# Altium PCB LibreSolar_BMS48V.PcbDoc (part 1 of 2)
Units mm, origin at the board's own origin, x right, y up, seen from the top; angles counter-clockwise.
Board outline 165 x 165 mm, 2 copper layers (Top, Bottom); 195 components, 138 nets, 620 pads, 56 vias.
Unrouted connection lines stored in the file: 54.
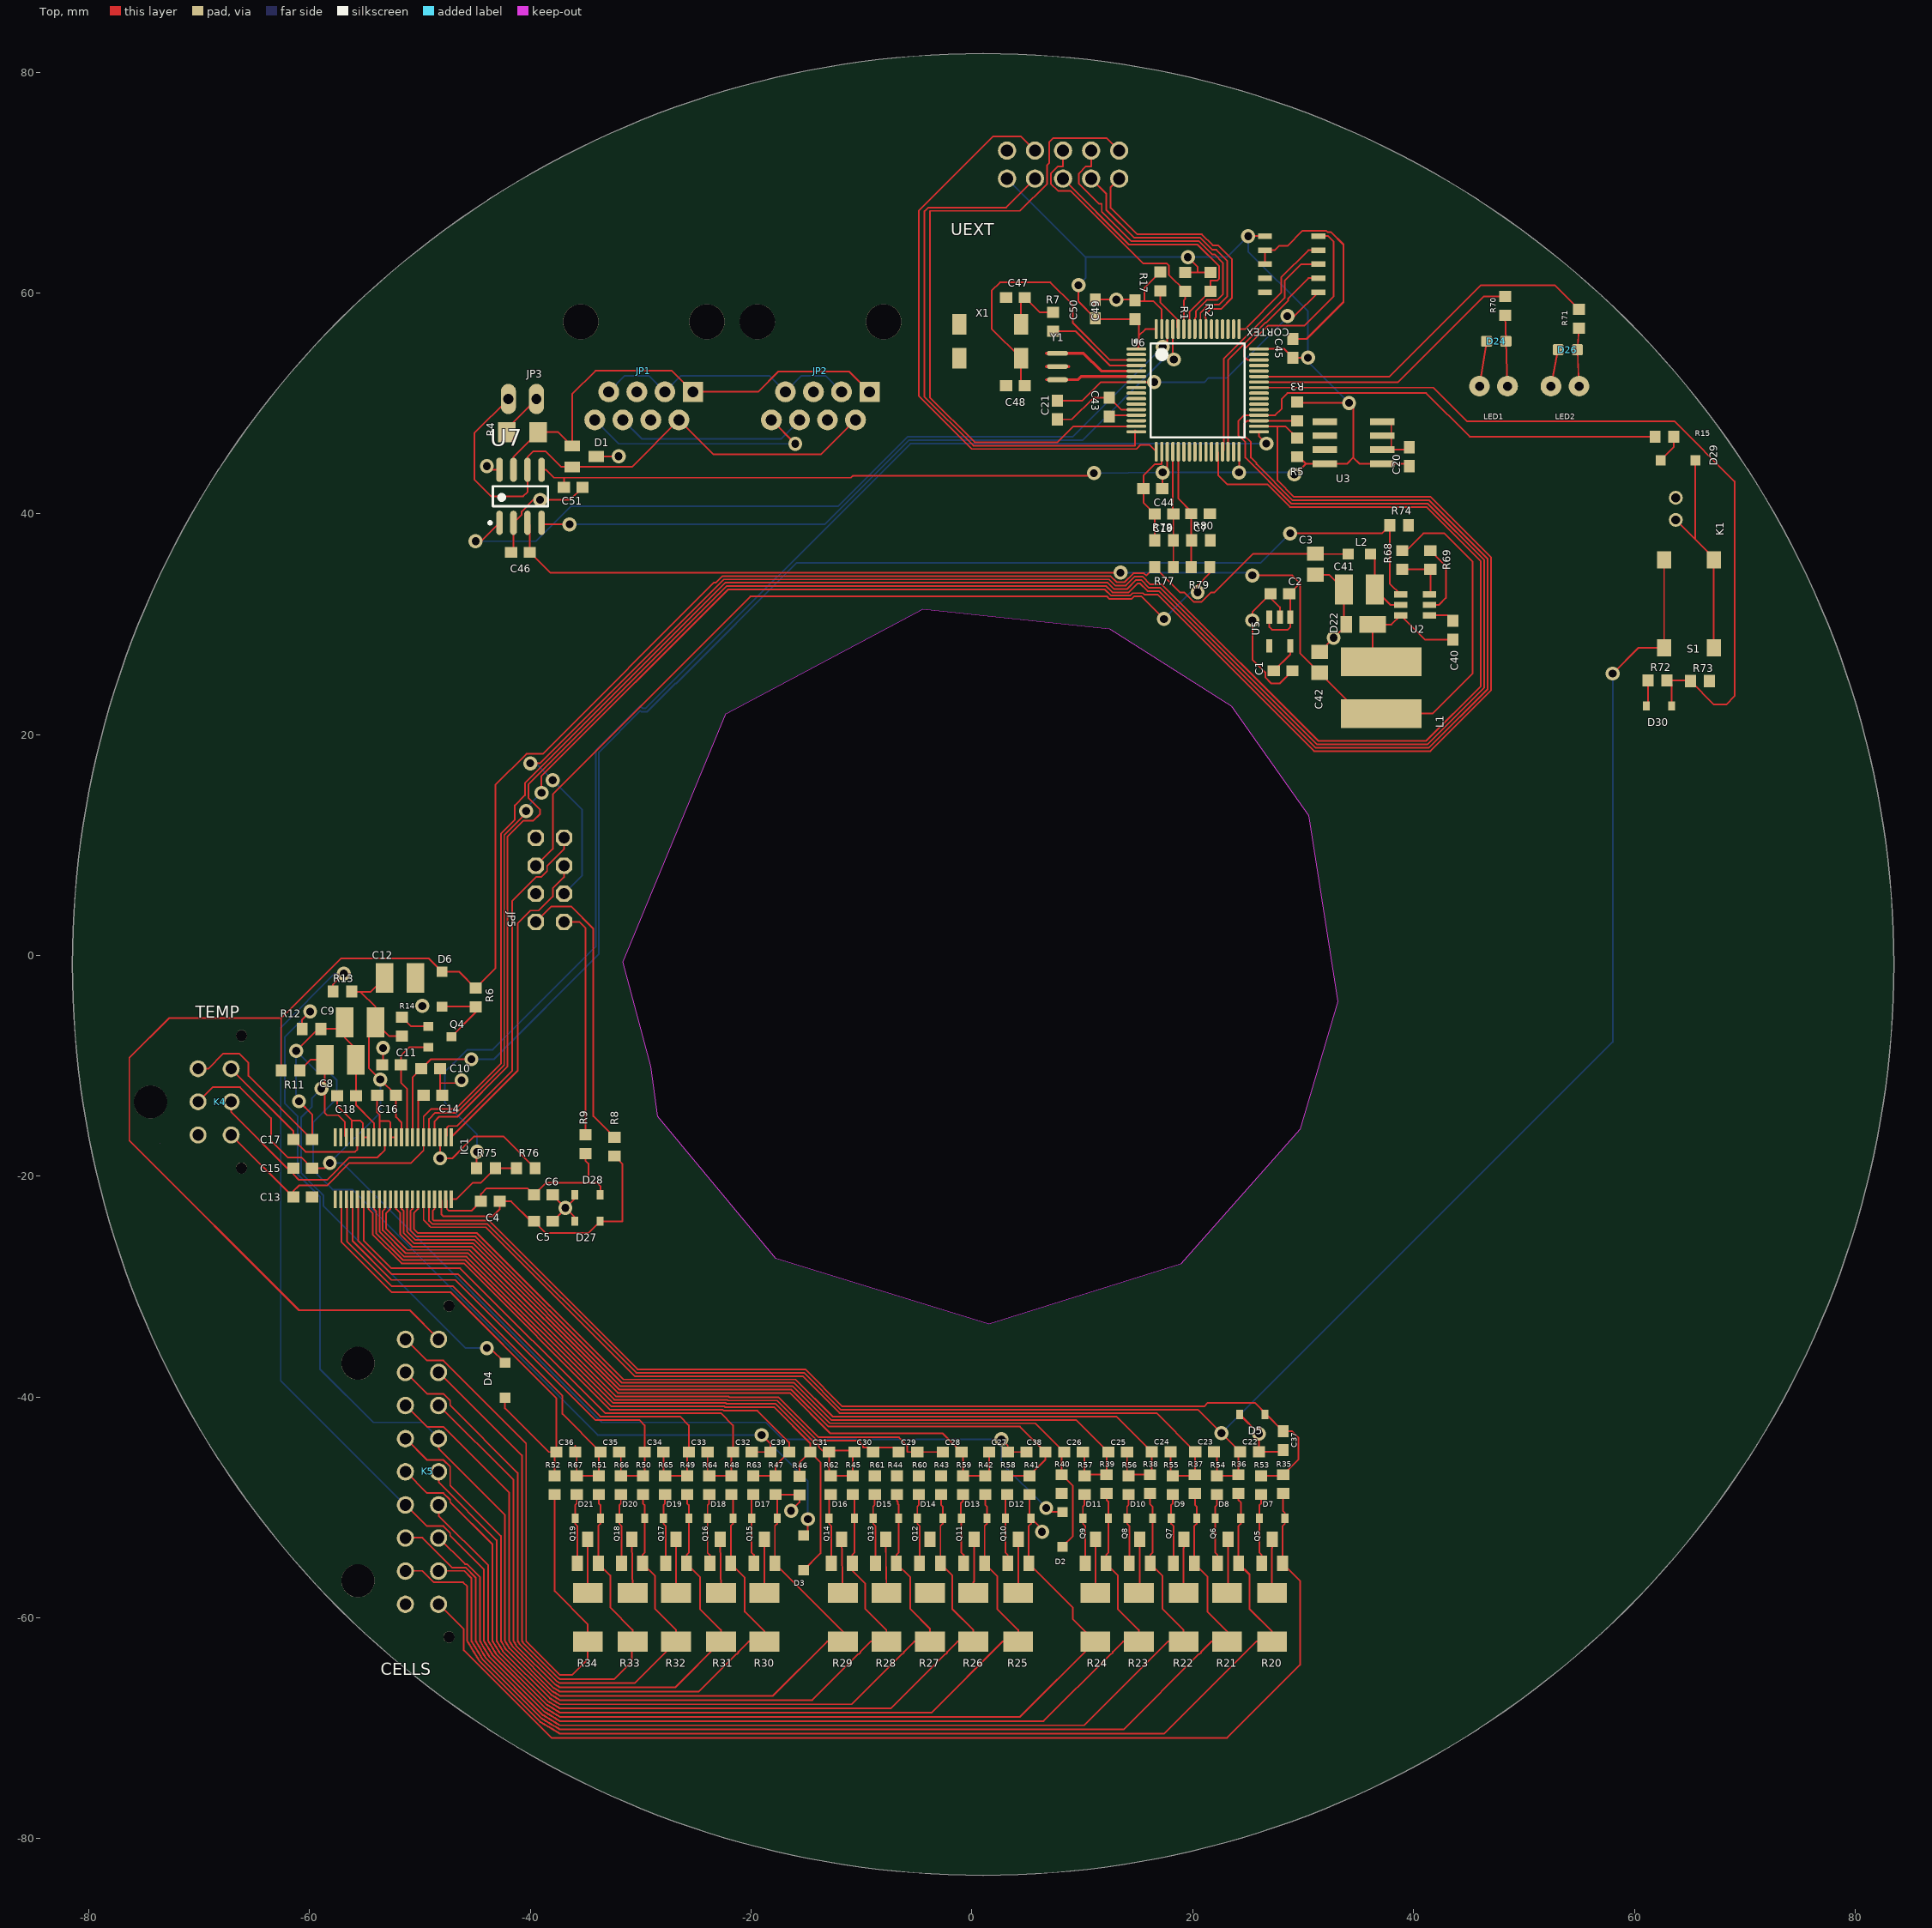
[diagram p0: Top view]
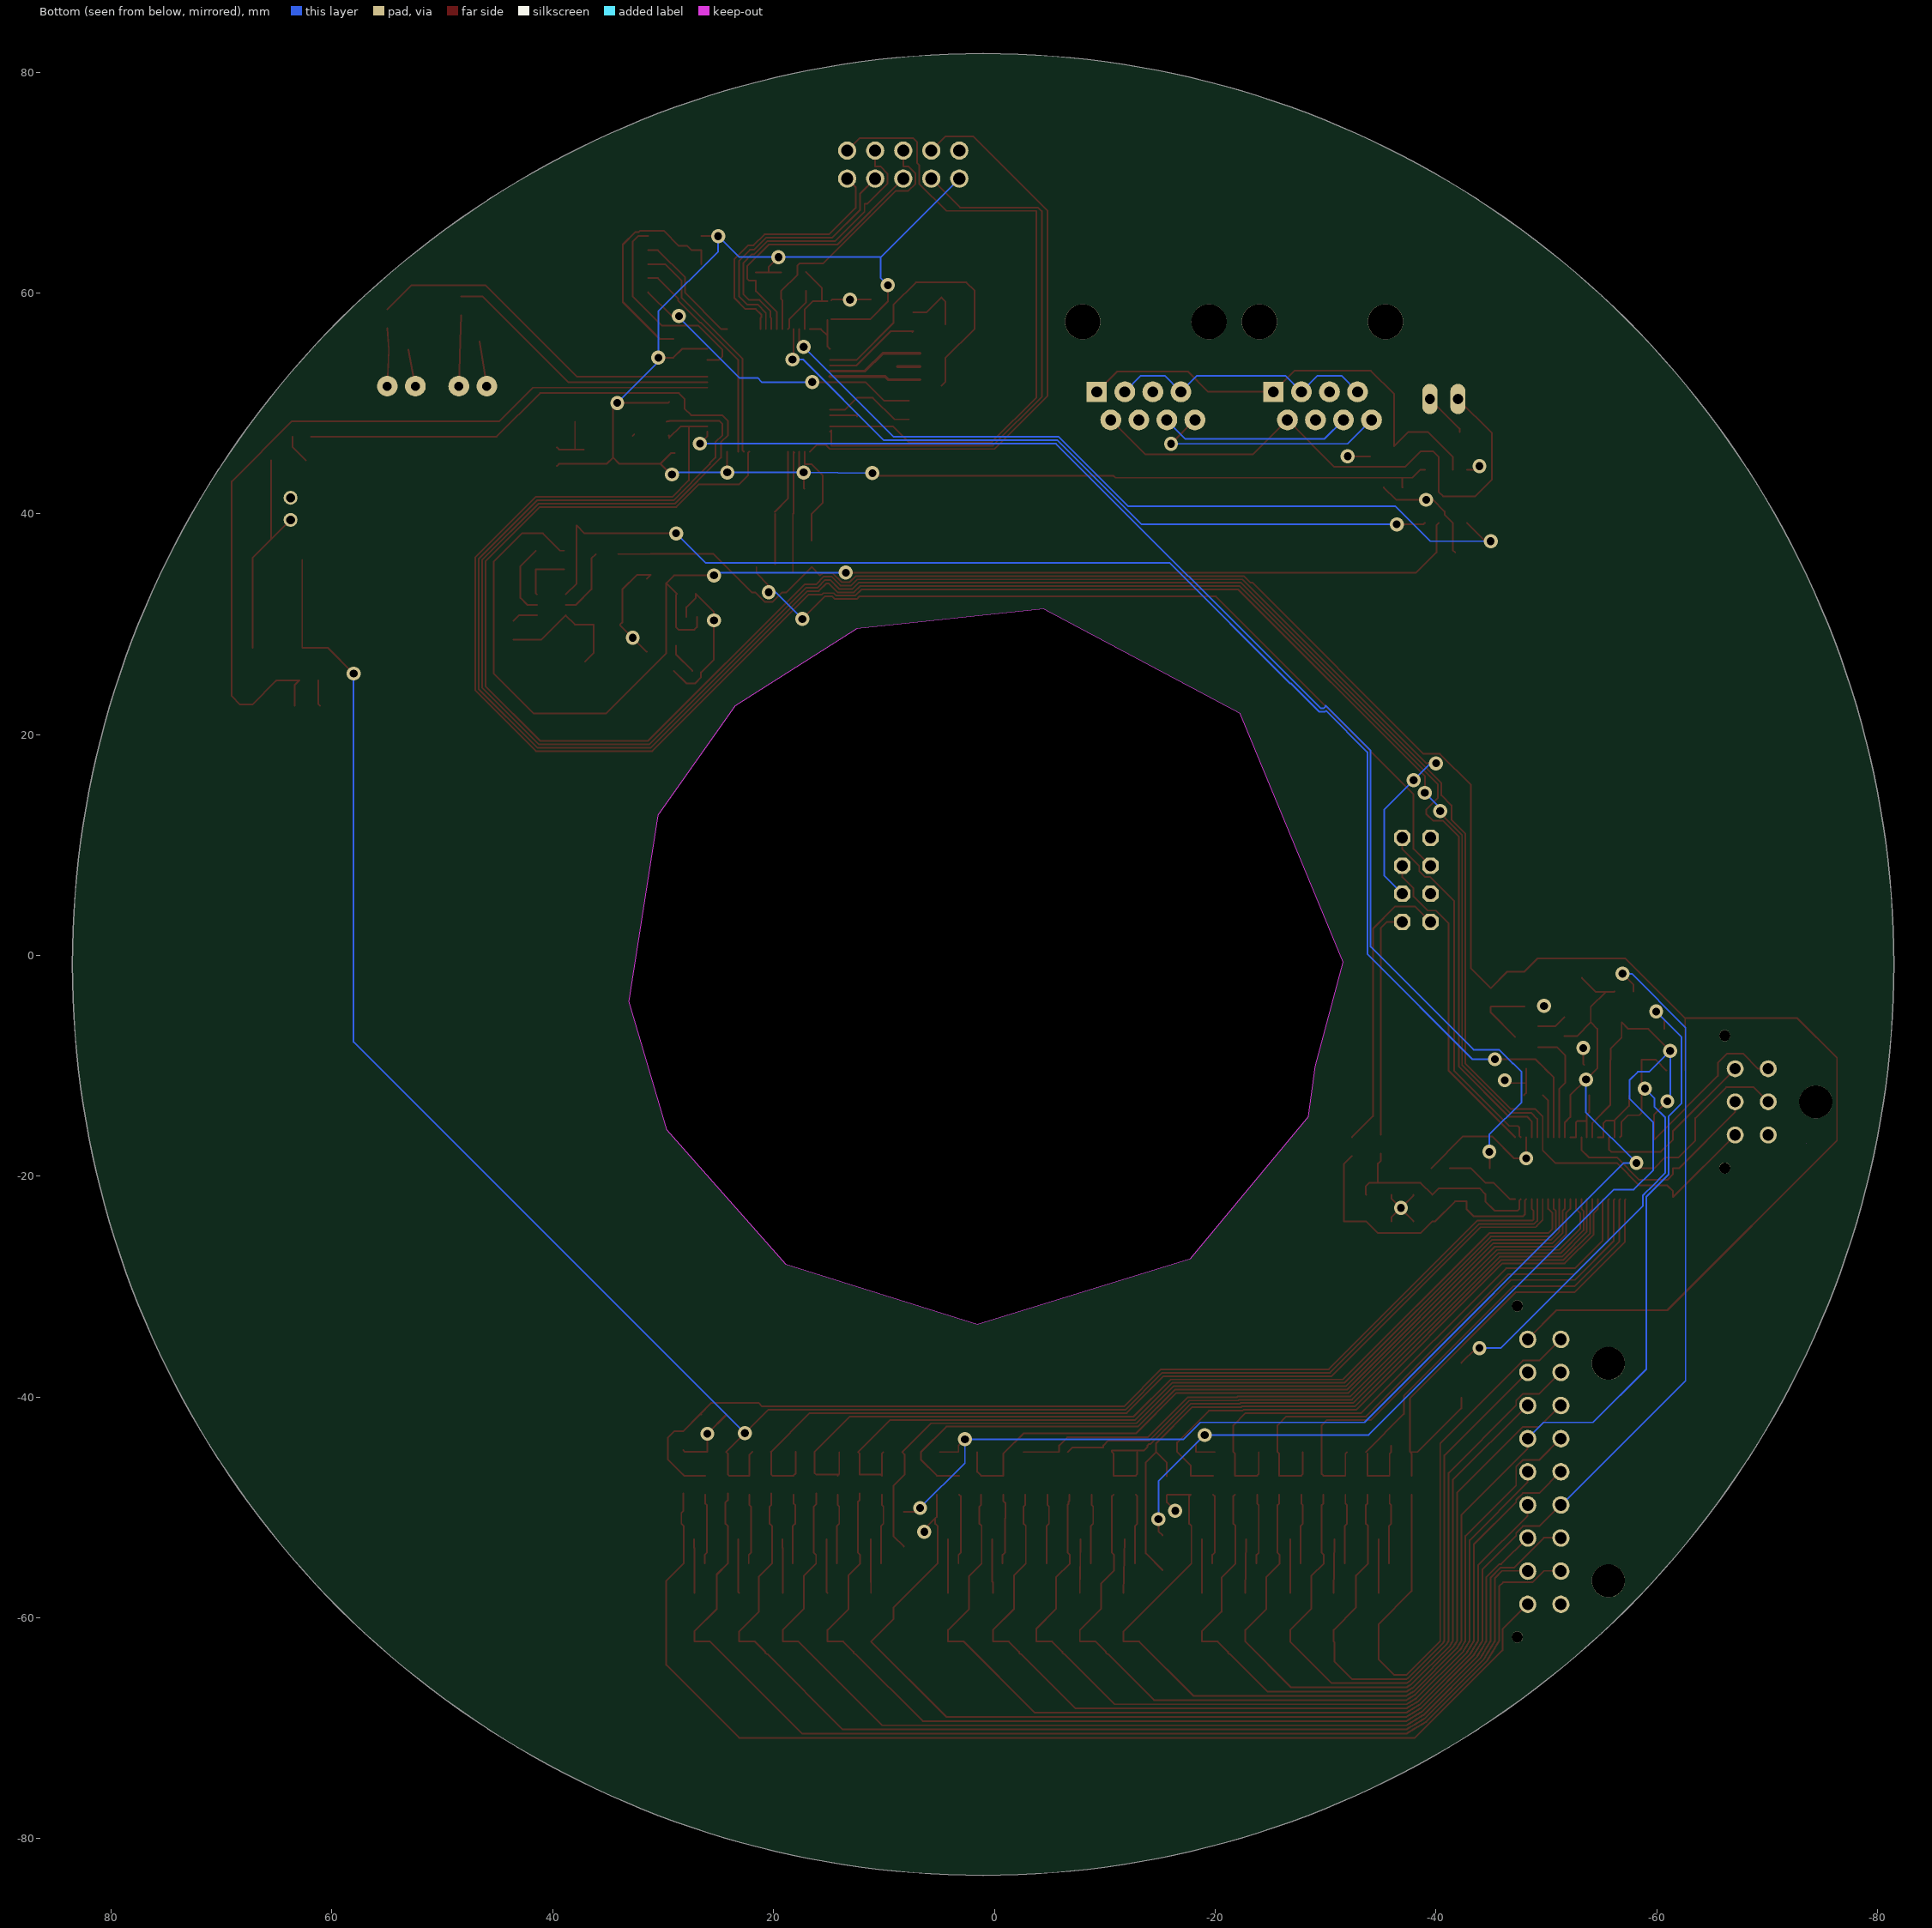
[diagram p1: Bottom view, seen from below]

## Layer stack, top to bottom
Top Solder: solder mask 0.0102, Solder Resist, Dk 3.5
Top: signal copper 0.035
Dielectric 1: dielectric 0.32, FR-4, Dk 4.8
Bottom: signal copper 0.035
Bottom Solder: solder mask 0.0102, Solder Resist, Dk 3.5

## Board outline
-81.484,-0.812 ccw(c1.016,-0.812) 1.016,-83.312 ccw(c1.016,-0.812) 83.516,-0.812 ccw(c1.016,-0.812) 1.016,81.688 ccw(c1.016,-0.812)
cut-out: -31.598,-0.601 -22.271,21.887 -4.445,31.369 12.446,29.591 23.495,22.606 30.48,12.7 33.147,-4.191 29.718,-15.748 18.923,-27.94 1.524,-33.401 -17.78,-27.432 -28.448,-14.605 -29.083,-10.033
cut-out: -73.533,-17.018

## Design rules (kind name [scope] priority, off if disabled: settings)
Clearance "Clearance (Same Net)" [All] p1: gap=0.152 ignorepadtopadclearanceinfootprint=TRUE except(0.203: Track-THPad SMDPad-SMDPad SMDPad-THPad THPad-THPad)
Clearance Clearance_for_NetClass_VIN [InNetClass('VIN') vs InNetClass('VIN')] p2: gap=0.152 ignorepadtopadclearanceinfootprint=FALSE
Clearance Clearance_for_NetClass_power [InNetClass('power') vs InNetClass('power')] p3: gap=0.152 ignorepadtopadclearanceinfootprint=FALSE
Clearance [All] p4: gap=0.152 ignorepadtopadclearanceinfootprint=TRUE except(0.203: Track-THPad THPad-THPad)
HoleSize HoleSize_For_NetClass_VIN [InNetClass('VIN')] p1: absolutevalues=TRUE maxlimit=0.3 minlimit=0.3 maxpercent=80.000 minpercent=20.000
HoleSize HoleSize_For_NetClass_power [InNetClass('power')] p2: absolutevalues=TRUE maxlimit=0.5 minlimit=0.5 maxpercent=80.000 minpercent=20.000
HoleSize [All] p3: absolutevalues=TRUE maxlimit=2540 minlimit=0.25 maxpercent=80.000 minpercent=20.000
HoleToHoleClearance mdDrill [All] p1: gap=0.61 allowstackedmicrovias=TRUE
PasteMaskExpansion mlMinCreamFrame [All] p1: expansion=0
PolygonConnect PolygonConnect_For_PolygonThermal_OFF [InPolygonClass('PolygonThermal_OFF')] p1: connectstyle=Direct reliefconductorwidth=0.254 reliefentries=4 polygonreliefangle="90 Angle" airgapwidth=0.254
PolygonConnect PolygonConnect_For_PolygonThermal_ON_Width160000_Gap120000 [InPolygonClass('PolygonThermal_ON_Width160000_Gap120000')] p2: connectstyle=Relief reliefconductorwidth=0.406 reliefentries=4 polygonreliefangle="90 Angle" airgapwidth=0.305
PolygonConnect ThermalVias [IsVia] p3: connectstyle=Direct reliefconductorwidth=0.254 reliefentries=4 polygonreliefangle="90 Angle" airgapwidth=0.254
PolygonConnect [All] p4: connectstyle=Relief reliefconductorwidth=0.254 reliefentries=4 polygonreliefangle="90 Angle" airgapwidth=0.254
RoutingVias [All] p1: holewidth=0.25 width=0.707 viastyle="Through Hole" minholewidth=0.25 minwidth=0.707 maxholewidth=2.54 maxwidth=2.54
ShortCircuit [All] p1: allowed=TRUE
SolderMaskExpansion mlMinStopFrame [All] p1: expansion=0.076
Width Width_For_NetClass_VIN [InNetClass('VIN')] p1: maxlimit=0.254 minlimit=0.203 preferedwidth=0.203
Width Width_For_NetClass_power [InNetClass('power')] p2: maxlimit=0.254 minlimit=0.203 preferedwidth=0.203
Width [All] p3: maxlimit=254 minlimit=0.152 preferedwidth=0.152
26 further rules are at their usual default settings.

## Classes and differential pairs
component class LibreSolar_BMS48V_1: C1 C2 C3 C20 C21 C40 C41 C42 C43 C44 C45 C46 C47 C48 C49 C50 C51 CORTEX D1 D22 D24 D26 JP1 JP2 JP3 L1 L2 LED1 LED2 R3 R4 R5 R7 R17 R68 R69 R70 R71 R74 U2 U3 U5 U6 U7 UEXT X1 Y1
component class LibreSolar_BMS48V_0: C4 C5 C6 C7 C8 C9 C10 C11 C12 C13 C14 C15 C16 C17 C18 C19 C22 C23 C24 C25 C26 C27 C28 C29 C30 C31 C32 C33 C34 C35 C36 C37 C38 C39 CELLS D2 D3 D4 D5 D6 D7 D8 D9 D10 D11 D12 D13 D14 D15 D16 D17 D18 D19 D20 D21 D27 D28 D29 D30 IC1 JP5 K1 K4 K5 Q4 Q5 Q6 Q7 Q8 Q9 Q10 Q11 Q12 Q13 Q14 Q15 Q16 Q17 Q18 Q19 R6 R8 R9 R11 R12 R13 R14 R15 R20 R21 R22 R23 R24 R25 R26 R27 R28 R29 R30 R31 R32 R33 R34 R35 R36 R37 R38 R39 R40 R41 R42 R43 R44 R45 R46 R47 R48 R49 R50 R51 R52 R53 R54 R55 R56 R57 R58 R59 R60 R61 R62 R63 R64 R65 R66 R67 R72 R73 R75 R76 R77 R78 R79 R80 S1 TEMP

## Components (designator, comment, footprint, x,y, rotation, side; value= is the part's Value field where it differs from the comment)
C1 "2.2µ" C0603 28.194,25.781 r0 top
C2 "1µ" C0603 27.894,32.753 r180 top
C3 "1µ" C0805 31.115,35.433 r270 top
C4 "100n" C0603 -43.622,-22.271 r180 top
C5 "100n" C0603 -38.822,-24.071 r0 top
C6 "100n" C0603 -38.822,-21.671 r0 top
C7 "100n" C0603 20.701,40.005 r0 top
C8 "10µ" C1210 -57.222,-9.455 r0 top
C9 "10µ" C1210 -55.422,-6.055 r0 top
C10 "1µ" C0603 -49.022,-10.255 r0 top
C11 "1µ" C0603 -52.578,-9.906 r180 top
C12 "10µ" C1210 -51.816,-2.032 r0 top
C13 "4.7n" C0603 -60.622,-21.871 r0 top
C14 "1µ" C0603 -48.822,-12.655 r0 top
C15 "4.7n" C0603 -60.622,-19.271 r0 top
C16 "1µ" C0603 -53.022,-12.655 r0 top
C17 "4.7n" C0603 -60.622,-16.671 r0 top
C18 "1µ" C0603 -56.642,-12.7 r0 top
C19 "100n" C0603 17.399,39.99 r180 top
C20 "100n" C0603 39.624,45.173 r90 top
C21 "100n" C0603 7.747,49.403 r270 top
C22 "100n" C0603 25.146,-44.958 r0 top
C23 "100n" C0603 21.082,-44.958 r0 top
C24 "100n" C0603 17.145,-44.958 r0 top
C25 "100n" C0603 13.201,-44.971 r0 top
C26 "100n" C0603 9.201,-44.971 r0 top
C27 "100n" C0603 2.401,-44.971 r0 top
C28 "100n" C0603 -1.799,-44.971 r0 top
C29 "100n" C0603 -5.799,-44.971 r0 top
C30 "100n" C0603 -9.799,-44.971 r0 top
C31 "100n" C0603 -13.799,-44.971 r0 top
C32 "100n" C0603 -20.799,-44.971 r0 top
C33 "100n" C0603 -24.799,-44.971 r0 top
C34 "100n" C0603 -28.799,-44.971 r0 top
C35 "100n" C0603 -32.799,-44.971 r0 top
C36 "100n" C0603 -36.799,-44.971 r0 top
C37 "100n" C0603 28.194,-43.942 r270 top
C38 "100n" C0603 5.801,-44.971 r0 top
C39 "100n" C0603 -17.399,-44.971 r0 top
C40 "100n" C0603 43.561,29.464 r270 top
C41 "2.2µ" C1210 35.094,33.153 r180 top
C42 "22µ" C0805 31.494,26.553 r90 top
C43 "100n" C0603 12.446,49.657 r90 top
C44 "100n" C0603 16.383,42.291 r180 top
C45 "100n" C0603 29.083,54.991 r90 top
C46 "100n" C0603 -40.894,36.505 r180 top
C47 "4.3p" C0603 3.948,59.594 r180 top
C48 "4.3p" C0603 3.948,51.594 r180 top
C49 "100n" C0603 14.764,58.489 r90 top
C50 "2.2µ" C0603 11.176,58.547 r90 top
C51 "100n" C0603 -36.12,42.394 r0 top
CELLS "66201821022" 66201821022 -55.626,-46.792 r270 top
CORTEX "CORTEX_DEBUGSMD" SAMTECH_FTSH-105-01 28.956,62.611 r270 top
D1 "NUP2105L" SOT23 -35.12,45.194 r270 top
D2 "1N4148W" SOD-123 8.201,-51.971 r270 top
D3 "1N4148W" SOD-123 -15.24,-54.102 r270 top
D4 "1N4148W" SOD-123 -42.291,-38.481 r270 top
D5 "3.3V" SOD-323 25.401,-41.571 r180 top
D6 "1N4148W" SOD-123 -48.006,-3.048 r90 top
D7 "5.6V" SOD-323 27.201,-50.971 r0 top
D8 "5.6V" SOD-323 23.201,-50.971 r0 top
D9 "5.6V" SOD-323 19.201,-50.971 r0 top
D10 "5.6V" SOD-323 15.201,-50.971 r0 top
D11 "5.6V" SOD-323 11.201,-50.971 r0 top
D12 "5.6V" SOD-323 4.201,-50.971 r0 top
D13 "5.6V" SOD-323 0.201,-50.971 r0 top
D14 "5.6V" SOD-323 -3.799,-50.971 r0 top
D15 "5.6V" SOD-323 -7.799,-50.971 r0 top
D16 "5.6V" SOD-323 -11.799,-50.971 r0 top
D17 "5.6V" SOD-323 -18.799,-50.971 r0 top
D18 "5.6V" SOD-323 -22.799,-50.971 r0 top
D19 "5.6V" SOD-323 -26.799,-50.971 r0 top
D20 "5.6V" SOD-323 -30.799,-50.971 r0 top
D21 "5.6V" SOD-323 -34.799,-50.971 r0 top
D22 "DFLS1100-7" POWERDI123 35.434,29.972 r0 top
D24 "LED0603" LED-0603 47.498,55.626 r90 top
D26 "LED0603" LED-0603 53.975,54.864 r90 top
D27 "3.3V" SOD-323 -34.822,-24.071 r180 top
D28 "3.3V" SOD-323 -34.822,-21.671 r180 top
D29 "1N4148W" SOD-123 63.951,44.85 r0 top
D30 "3.3V" SOD-323 62.23,22.606 r180 top
IC1 "BQ76940" TSSOP44 -52.422,-19.271 r270 top
JP1 "RJ45" RJ45-8 -29.72,57.394 r180 top
JP2 "RJ45" RJ45-8 -13.72,57.394 r180 top
JP3 "JP1Q" JP1 -40.72,50.394 r90 top
JP5 "PINHD-2X4" 2X04 -38.227,6.858 r270 top
K1 "62000211622" 62000211622 63.751,40.45 r270 top
K4 "66200621122" 66200621122 -68.604,-13.256 r270 top
K5 "66201821122" 66201821122 -49.808,-46.736 r270 top
L1 "47uH" WE-TPC_6823 37.084,24.257 r270 top
L2 "4.7uH" L2012C 35.094,36.353 r180 top
LED1 "LED3MM" LED3MM 47.244,51.562 r180 top
LED2 "LED3MM" LED3MM 53.721,51.562 r180 top
Q4 "BSS123" SOT23-3 -48.26,-7.366 r270 top
Q5 "DMN2004K" SOT23 27.201,-53.971 r0 top
Q6 "DMN2004K" SOT23 23.201,-53.971 r0 top
Q7 "DMN2004K" SOT23 19.201,-53.971 r0 top
Q8 "DMN2004K" SOT23 15.201,-53.971 r0 top
Q9 "DMN2004K" SOT23 11.201,-53.971 r0 top
Q10 "DMN2004K" SOT23 4.201,-53.971 r0 top
Q11 "DMN2004K" SOT23 0.201,-53.971 r0 top
Q12 "DMN2004K" SOT23 -3.799,-53.971 r0 top
Q13 "DMN2004K" SOT23 -7.799,-53.971 r0 top
Q14 "DMN2004K" SOT23 -11.799,-53.971 r0 top
Q15 "DMN2004K" SOT23 -18.799,-53.971 r0 top
Q16 "DMN2004K" SOT23 -22.799,-53.971 r0 top
Q17 "DMN2004K" SOT23 -26.799,-53.971 r0 top
Q18 "DMN2004K" SOT23 -30.799,-53.971 r0 top
Q19 "DMN2004K" SOT23 -34.799,-53.971 r0 top
R1 "2.2k" R0603 19.328,61.009 r90 top
R2 "2.2k" R0603 21.599,61.009 r90 top
R3 "2.2k" R0603 29.464,49.276 r90 top
R4 "120" R1206 -40.72,47.394 r180 top
R5 "2.2k" R0603 29.464,46.025 r270 top
R6 "t.b.d." R0603 -44.958,-3.81 r270 top
R7 "0R" R0603 7.348,57.394 r90 top
R8 "1k" R0603 -32.385,-17.311 r270 top
R9 "1k" R0603 -35.013,-17.099 r270 top
R11 "100" R0603 -61.722,-10.414 r0 top
R12 "100" R0603 -59.822,-6.655 r0 top
R13 "100" R0603 -57.022,-3.255 r0 top
R14 "100k" R0603 -51.622,-6.455 r90 top
R15 "5.6k" R0603 62.738,46.99 r0 top
R17 "10k" R0603 17.057,61.048 r90 top
R20 "33" R2010 27.178,-59.944 r90 top
R21 "33" R2010 23.114,-59.944 r90 top
R22 "33" R2010 19.177,-59.944 r90 top
R23 "33" R2010 15.113,-59.944 r90 top
R24 "33" R2010 11.176,-59.944 r90 top
R25 "33" R2010 4.191,-59.944 r90 top
R26 "33" R2010 0.127,-59.944 r90 top
R27 "33" R2010 -3.81,-59.944 r90 top
R28 "33" R2010 -7.747,-59.944 r90 top
R29 "33" R2010 -11.684,-59.944 r90 top
R30 "33" R2010 -18.796,-59.944 r90 top
R31 "33" R2010 -22.733,-59.944 r90 top
R32 "33" R2010 -26.797,-59.944 r90 top
R33 "33" R2010 -30.734,-59.944 r90 top
R34 "33" R2010 -34.798,-59.944 r90 top
R35 "1k" R0603 28.194,-47.879 r90 top
R36 "1k" R0603 24.13,-47.879 r90 top
R37 "1k" R0603 20.193,-47.879 r90 top
R38 "1k" R0603 16.129,-47.879 r90 top
R39 "1k" R0603 12.192,-47.879 r90 top
R40 "1k" R0603 8.128,-47.879 r90 top
R41 "1k" R0603 5.201,-47.971 r90 top
R42 "1k" R0603 1.201,-47.971 r90 top
R43 "1k" R0603 -2.799,-47.971 r90 top
R44 "1k" R0603 -6.799,-47.971 r90 top
R45 "1k" R0603 -10.799,-47.971 r90 top
R46 "1k" R0603 -15.621,-48.006 r90 top
R47 "1k" R0603 -17.799,-47.971 r90 top
R48 "1k" R0603 -21.799,-47.971 r90 top
R49 "1k" R0603 -25.799,-47.971 r90 top
R50 "1k" R0603 -29.799,-47.971 r90 top
R51 "1k" R0603 -33.799,-47.971 r90 top
R52 "1k" R0603 -37.799,-47.971 r90 top
R53 "10k" R0603 26.201,-47.971 r270 top
R54 "10k" R0603 22.201,-47.971 r270 top
R55 "10k" R0603 18.201,-47.971 r270 top
R56 "10k" R0603 14.201,-47.971 r270 top
R57 "10k" R0603 10.201,-47.971 r270 top
R58 "10k" R0603 3.201,-47.971 r270 top
R59 "10k" R0603 -0.799,-47.971 r270 top
R60 "10k" R0603 -4.799,-47.971 r270 top
R61 "10k" R0603 -8.799,-47.971 r270 top
R62 "10k" R0603 -12.799,-47.971 r270 top
R63 "10k" R0603 -19.799,-47.971 r270 top
R64 "10k" R0603 -23.799,-47.971 r270 top
R65 "10k" R0603 -27.799,-47.971 r270 top
R66 "10k" R0603 -31.799,-47.971 r270 top
R67 "10k" R0603 -35.799,-47.971 r270 top
R68 "56k" R0603 38.989,35.814 r90 top
R69 "10k" R0603 41.529,35.814 r270 top
R70 "330" R0603 48.315,58.826 r90 top
R71 "330" R0603 54.991,57.658 r90 top
R72 "100k" R0603 62.103,24.915 r0 top
R73 "10k" R0603 65.951,24.85 r0 top
R74 "100k" R0603 38.694,38.953 r180 top
R75 "1k" R0603 -44.022,-19.271 r180 top
R76 "1M" R0603 -40.422,-19.271 r180 top
R77 "100k" R0603 17.399,35.179 r180 top
R78 "5.6k" R0603 17.399,37.592 r0 top
R79 "100k" R0603 20.701,35.179 r0 top
R80 "5.6k" R0603 20.74,37.592 r180 top
S1 "430182050816" 430182050816 64.951,31.85 r90 top
TEMP "66200621022" 66200621022 -74.404,-13.256 r270 top
U2 "LMR16006X" SOT23-6 40.132,31.75 r270 top
U3 "M24256-BW" SO08 34.564,46.439 r90 top
U5 "MIC5225" SOT23-5 27.894,29.353 r180 top
U6 "STM32F405RGT6" STM-LQFP64_N 20.447,51.181 r0 top
U7 "MCP2551T-I/SN" SOIC-SN8_N -40.894,41.585 r90 top
UEXT "UEXT" UEXT 8.255,71.628 r90 top
X1 "ABS25-32.768KHZ-6" MM20SS 1.651,55.626 r180 top
Y1 "8MHz" RESONATOR-SMD-1:1 7.747,53.34 r270 top

## Footprints (in the part's own frame and the unit in brackets; to place one, negate y for a bottom-side part, rotate by r counter-clockwise, add the part's x,y. Pads: shape width x height; smd on the part's side, far side on the other; paste and mask are expansions set on the pad)
2X04 [mil] "2X04"
  oct 58.09x58.09 / inner oct 60x60 / far side oct 58.09x58.09 hole 40: 1(-150,-50) 2(-150,50) 3(-50,-50) 4(-50,50) 5(50,-50) 6(50,50) 7(150,-50) 8(150,50)
62000211622 [mil] "62000211622"
  round 49.5 / inner round 60 / far side round 49.5 hole 31.5: 1(39.37,0) 2(-39.37,0)
66200621022 [mm] "66200621022"
  round 3 hole 3 unplated: 1(0,0)
  round 1.53 / inner round 1.524 / far side round 1.53 hole 1.02: 1(3,4.3) 2(0,4.3) 3(-3,4.3) 4(3,7.3) 5(0,7.3) 6(-3,7.3)
66200621122 [mm] "66200621122"
  round 1.02 hole 1.02 unplated: 1(-6,2.44) 1(6,2.44)
  round 1.53 / inner round 1.524 / far side round 1.53 hole 1.02: 1(3,-1.5) 2(0,-1.5) 3(-3,-1.5) 4(3,1.5) 5(0,1.5) 6(-3,1.5)
66201821022 [mm] "66201821022"
  round 3 hole 3 unplated: 1(-9.85,0) 1(9.85,0)
  round 1.53 / inner round 1.524 / far side round 1.53 hole 1.02: 1(12,4.3) 2(9,4.3) 3(6,4.3) 4(3,4.3) 5(0,4.3) 6(-3,4.3) 7(-6,4.3) 8(-9,4.3) 9(-12,4.3) 10(12,7.3) 11(9,7.3) 12(6,7.3) 13(3,7.3) 14(0,7.3) 15(-3,7.3) 16(-6,7.3) 17(-9,7.3) 18(-12,7.3)
66201821122 [mm] "66201821122"
  round 1.02 hole 1.02 unplated: 1(-15,2.44) 1(15,2.44)
  round 1.53 / inner round 1.524 / far side round 1.53 hole 1.02: 1(12,-1.5) 2(9,-1.5) 3(6,-1.5) 4(3,-1.5) 5(0,-1.5) 6(-3,-1.5) 7(-6,-1.5) 8(-9,-1.5) 9(-12,-1.5) 10(12,1.5) 11(9,1.5) 12(6,1.5) 13(3,1.5) 14(0,1.5) 15(-3,1.5) 16(-6,1.5) 17(-9,1.5) 18(-12,1.5)
430182050816 [mil] "430182050816"
  rect 61.02x51.18 smd: 1(-156.5,88.58) 2(-156.5,-88.58) 3(156.5,88.58) 4(156.5,-88.58)
C0603 [mm] "C0603"
  rect 1.1x1 smd: 1(-0.85,0) 2(0.85,0)
C0805 [mm] "C0805"
  rect 1.3x1.5 smd: 1(-0.95,0) 2(0.95,0)
C1210 [mm] "C1210"
  rect 1.6x2.7 smd: 1(-1.4,0) 2(1.4,0)
JP1 [mil] "JP1"
  oval 108x54 / inner round 60 / far side oval 108x54 hole 36: 1(0,-50) 2(0,50)
L2012C [mm] "L2012C"
  rect 1x1 smd: 1(-1,0) 2(1,0)
LED3MM [mil] "LED3MM"
  round 74 / inner round 60 / far side round 74 hole 32: A(-50,0) K(50,0)
LED-0603 [mm] "LED-0603"
  rrect30% 1x1 smd: A(0,-0.877) C(0,0.877)
MM20SS [mil] "MM20SS"
  rect 50x74 smd: 1(-110,-60) 2(110,-60) 3(110,60) 4(-110,60)
POWERDI123 [mm] "POWERDI123"
  rect 1.05x1.5 smd: A(-1.525,0)
  rect 2.4x1.5 smd: C(0.85,0)
R0603 [mm] "R0603"
  rect 1x1.1 smd: 1(-0.85,0) 2(0.85,0)
R1206 [mm] "R1206"
  rect 1.6x1.803 smd: 1(-1.422,0) 2(1.422,0)
R2010 [mm] "R2010"
  rect 1.8x2.7 smd: 1(-2.2,0) 2(2.2,0)
RESONATOR-SMD-1:1 [mm] "RESONATOR-SMD-1:1"
  rrect100% 0.45x1.905 smd: 1(-1.2,0) 2(0,0) 3(1.2,0)
  Top lines w0.254: 1.2,-1.016 1.2,0 1.2,1.016 ; 0,-1.016 0,0 0,1.016 ; -1.2,-1.016 -1.2,0 -1.2,1.016
RJ45-8 [mil] "RJ45-8"
  round 125.98 hole 125.98 unplated: 1(-225,0) 1(225,0)
  rect 71.65x71.65 / inner rect 60x60 / far side rect 71.65x71.65 hole 39.37: 1(-175,250)
  round 74 / inner round 60 / far side round 74 hole 39.37: 2(-125,350) 3(-75,250) 4(-25,350) 5(25,250) 6(75,350) 7(125,250) 8(175,350)
SAMTECH_FTSH-105-01 [mil] "SAMTECH_FTSH-105-01"
  rect 20x50 smd: 1(-100,-95) 2(-100,95) 3(-50,-95) 4(-50,95) 5(0,-95) 6(0,95) 7(50,-95) 8(50,95) 9(100,-95) 10(100,95)
SO08 [mil] "SO08"
  rect 24x87 smd: 1(-75,-103) 2(-25,-103) 3(25,-103) 4(75,-103) 5(75,103) 6(25,103) 7(-25,103) 8(-75,103)
SOD-123 [mm] "SOD-123"
  rect 0.9x0.95 smd: A(1.575,0) C(-1.575,0)
SOD-323 [mm] "SOD-323"
  rect 0.63x0.83 smd: A(1.15,0) C(-1.15,0)
SOIC-SN8_N [mm] "SOIC, 8-Leads, Body 4.9x3.8mm, Pitch 1.27mm, IPC Medium Density"
  oval 2.2x0.6 smd: 1(-2.4,1.905) 2(-2.4,0.635) 3(-2.4,-0.635) 4(-2.4,-1.905) 5(2.4,-1.905) 6(2.4,-0.635) 7(2.4,0.635) 8(2.4,1.905)
  silkscreen extent -2.52,-2.5 0.9,2.88, body extent -2,-2.5 2,2.5, height 1.75
SOT23 [mm] "SOT23"
  rect 1x1.4 smd: 1(-0.95,-1.1) 2(0.95,-1.1) 3(0,1.1)
SOT23-3 [mil] "SOT23-3"
  rect 31.5x35.43 smd: 1(-37.4,-39.37) 2(37.4,-39.37) 3(0,43.31)
SOT23-5 [mm] "SOT23-5"
  rect 0.55x1.2 smd: 1(-0.95,-1.3) 2(0,-1.3) 3(0.95,-1.3) 4(0.95,1.3) 5(-0.95,1.3)
SOT23-6 [mm] "SOT23-6"
  rect 0.55x1.2 smd: 1(0.95,1.3) 2(0,1.3) 3(-0.95,1.3) 4(-0.95,-1.3) 5(0,-1.3) 6(0.95,-1.3)
STM-LQFP64_N [mm] "Thin QFP, 64-Leads, Body 10x10mm, Pitch 0.5mm, IPC Medium Density"
  oval 1.8x0.3 smd: 1(-5.55,3.75) 2(-5.55,3.25) 3(-5.55,2.75) 4(-5.55,2.25) 5(-5.55,1.75) 6(-5.55,1.25) 7(-5.55,0.75) 8(-5.55,0.25) 9(-5.55,-0.25) 10(-5.55,-0.75) 11(-5.55,-1.25) 12(-5.55,-1.75) 13(-5.55,-2.25) 14(-5.55,-2.75) 15(-5.55,-3.25) 16(-5.55,-3.75) 33(5.55,-3.75) 34(5.55,-3.25) 35(5.55,-2.75) 36(5.55,-2.25) 37(5.55,-1.75) 38(5.55,-1.25) 39(5.55,-0.75) 40(5.55,-0.25) 41(5.55,0.25) 42(5.55,0.75) 43(5.55,1.25) 44(5.55,1.75) 45(5.55,2.25) 46(5.55,2.75) 47(5.55,3.25) 48(5.55,3.75)
  oval 0.3x1.8 smd: 17(-3.75,-5.55) 18(-3.25,-5.55) 19(-2.75,-5.55) 20(-2.25,-5.55) 21(-1.75,-5.55) 22(-1.25,-5.55) 23(-0.75,-5.55) 24(-0.25,-5.55) 25(0.25,-5.55) 26(0.75,-5.55) 27(1.25,-5.55) 28(1.75,-5.55) 29(2.25,-5.55) 30(2.75,-5.55) 31(3.25,-5.55) 32(3.75,-5.55) 49(3.75,5.55) 50(3.25,5.55) 51(2.75,5.55) 52(2.25,5.55) 53(1.75,5.55) 54(1.25,5.55) 55(0.75,5.55) 56(0.25,5.55) 57(-0.25,5.55) 58(-0.75,5.55) 59(-1.25,5.55) 60(-1.75,5.55) 61(-2.25,5.55) 62(-2.75,5.55) 63(-3.25,5.55) 64(-3.75,5.55)
  silkscreen extent -5.67,-4.25 4.25,4.57, body extent -5,-5 5,5, height 1.6
TSSOP44 [mm] "TSSOP44"
  rect 1.6x0.29 smd: 1(-2.8,5.25) 2(-2.8,4.75) 3(-2.8,4.25) 4(-2.8,3.75) 5(-2.8,3.25) 6(-2.8,2.75) 7(-2.8,2.25) 8(-2.8,1.75) 9(-2.8,1.25) 10(-2.8,0.75) 11(-2.8,0.25) 12(-2.8,-0.25) 13(-2.8,-0.75) 14(-2.8,-1.25) 15(-2.8,-1.75) 16(-2.8,-2.25) 17(-2.8,-2.75) 18(-2.8,-3.25) 19(-2.8,-3.75) 20(-2.8,-4.25) 21(-2.8,-4.75) 22(-2.8,-5.25) 23(2.8,-5.25) 24(2.8,-4.75) 25(2.8,-4.25) 26(2.8,-3.75) 27(2.8,-3.25) 28(2.8,-2.75) 29(2.8,-2.25) 30(2.8,-1.75) 31(2.8,-1.25) 32(2.8,-0.75) 33(2.8,-0.25) 34(2.8,0.25) 35(2.8,0.75) 36(2.8,1.25) 37(2.8,1.75) 38(2.8,2.25) 39(2.8,2.75) 40(2.8,3.25) 41(2.8,3.75) 42(2.8,4.25) 43(2.8,4.75) 44(2.8,5.25)
UEXT [mm] "UEXT"
  round 1.65 / inner round 1.524 / far side round 1.65 hole 1.1: 1(-1.27,5.08) 2(1.27,5.08) 3(-1.27,2.54) 4(1.27,2.54) 5(-1.27,0) 6(1.27,0) 7(-1.27,-2.54) 8(1.27,-2.54) 9(-1.27,-5.08) 10(1.27,-5.08)
WE-TPC_6823 [mm] "WE-TPC_6823"
  rect 2.6x7.3 smd: 1(-2.35,0) 2(2.35,0)

## Part data
C1 C10 C50: library part C-EUC0603, "CAPACITOR, European symbol", MPN=0805YC475KAT2A, DeviceName=C0603, DeviceSetName=C-EU, GateName_1=G$1, LibraryName=rcl, MF=AVX, OC_FARNELL=1657937, SymbolName_1=C-EU
C2: library part C-EUC0603, "CAPACITOR, European symbol", MPN=08055C104KAT2A, DeviceName=C0603, DeviceSetName=C-EU, GateName_1=G$1, LibraryName=rcl, MF=AVX, OC_FARNELL=499687, SymbolName_1=C-EU
C3: library part C-EUC0805, "CAPACITOR, European symbol", MPN=08055C104KAT2A, DeviceName=C0805, DeviceSetName=C-EU, GateName_1=G$1, LibraryName=rcl, MF=AVX, OC_FARNELL=499687, SymbolName_1=C-EU
C4 C5 C6 C7 C13 C15 C17 C19 C22 C23 C24 C25 C26 C27 C28 C29 C30 C31 C32 C33 C34 C35 C36 C37 C38 C39 C40: library part C-EUC0603, "CAPACITOR, European symbol", MPN=0603B104K500CT, DeviceName=C0603, DeviceSetName=C-EU, GateName_1=G$1, LibraryName=rcl, MF=WALSIN, OC_FARNELL=2496834, SymbolName_1=C-EU
C8 C9 C12: library part C-EUC1210, "CAPACITOR, European symbol", MPN=GRM32ER7YA106KA12L, DeviceName=C1210, DeviceSetName=C-EU, GateName_1=G$1, LibraryName=rcl, MF=MURATA, OC_FARNELL=1735537, SymbolName_1=C-EU
C11 C14 C16 C18: library part C-EUC0603, "CAPACITOR, European symbol", MPN=GRM188R71E105KA12D, DeviceName=C0603, DeviceSetName=C-EU, GateName_1=G$1, LibraryName=rcl, MF=MURATA, OC_FARNELL=1735540, SymbolName_1=C-EU
C20 C21 C43 C44 C45 C47 C48 C49: library part C-EUC0603, "CAPACITOR, European symbol", MPN=GRM188R71H104KA93D, DeviceName=C0603, DeviceSetName=C-EU, GateName_1=G$1, LibraryName=rcl, MF=MURATA, OC_FARNELL=8820023, SymbolName_1=C-EU
C41: library part C-EUC1210, "CAPACITOR, European symbol", MPN=C3225X7R2A225K230AB, DeviceName=C1210, DeviceSetName=C-EU, GateName_1=G$1, LibraryName=rcl, MF=TDK, OC_FARNELL=2112727, SymbolName_1=C-EU
C42: library part C-EUC0805, "CAPACITOR, European symbol", MPN=GRM21BR60J226ME39L, DeviceName=C0805, DeviceSetName=C-EU, GateName_1=G$1, LibraryName=rcl, MF=MURATA, OC_FARNELL=1735531, SymbolName_1=C-EU
C46 C51: library part C-EUC0603, "CAPACITOR, European symbol", MPN=06035C104KAT2A, DeviceName=C0603, DeviceSetName=C-EU, GateName_1=G$1, LibraryName=rcl, MF=AVX, OC_FARNELL=1301804, SymbolName_1=C-EU
CELLS: "WR-MPC3 3.00mm Male Dual Row Angled Header with Plastic Pegs, 18 Pins=>Code : Con_WTB-MPC3_2_PCB_THT66201821022  Details see: http://katalog.we-online.de/en/em/662_0xx_210_22Created 2014-06-06, Karrer Zheng2014 (C) Würth Elektronik", DeviceSetName=66201821022, GateName_1=G$1, LibraryName=Wire_to_Board_Connectors_rev15d, SymbolName_1=9X9
CORTEX: "Cortex Debug ConnectorDatasheet", DeviceName=SMD, DeviceSetName=CORTEX_DEBUG, GateName_1=G$1, LibraryName=LibreSolar, SymbolName_1=CORTEX_DEBUG
D1: library part PESD2CAN, "CAN bus ESD protection diodeSource: http://www.nxp.com/documents/data_sheet/PESD1CAN.pdf", DeviceSetName=PESD2CAN, GateName_1=G$1, LibraryName=LibreSolar, MF=NXP, MPN=PESD2CAN, OC_FARNELL=1510712, SymbolName_1=PESD2CAN
D2 D3 D4 D6 D29: library part DIODESOD123, "DiodeThese are standard reverse protection diodes and small signal diodes. SMA package can handle up to about 1A. SOD-323 can handle about 200mA. What the SOD-323 package when ordering, there are some mfgs out there that are 5-pin packages.", MPN=1N4148W-7-F., DeviceName=SOD123, DeviceSetName=DIODE, GateName_1=G$1, LibraryName=SparkFun-DiscreteSemi, MF="DIODES INC.", OC_FARNELL=1776392, SymbolName_1=DIODE
D5 D7 D8 D9 D10 D11 D12 D13 D14 D15 D16 D17 D18 D19 D20 D21 D27 D28 D30: library part DIODE-ZENER5.6V, "Zener Diode Production Part - 8199 3.4V Zener Voltage", MPN=BZX384-C5V6, DeviceName=5.6V, DeviceSetName=DIODE-ZENER, GateName_1=G$1, LibraryName=SparkFun-DiscreteSemi, MF=NXP, OC_FARNELL=8735743, PROD_ID=DIO-12442, SymbolName_1=DIODE-ZENER
D22: library part SCHOTTKY-DIODEPOWERDI123, "Schottky Diode", DeviceName=POWERDI123, DeviceSetName=SCHOTTKY-DIODE, GateName_1=G$1, LibraryName=resolut, MF="DIODES INC.", MPN=DFLS1100-7, OC_FARNELL=1713889, SymbolName_1=SCHOTTKY
D24 D26 LED1 LED2: "LEDsStandard schematic elements and footprints for 5mm, 3mm, 1206, and 0603 sized LEDs. 5mm - Spark Fun Electronics SKU : COM-00529 (and others)", DeviceSetName=LED, GateName_1=G$1, LibraryName=SparkFun-LED, OC_FARNELL=unknown, SymbolName_1=LED
  D24 D26: DeviceName=0603
  LED1 LED2: DeviceName=3MM
IC1: MPN=BQ7694003DBT, DeviceSetName=BQ76940, GateName_1=G$1, LibraryName=LibreSolar, MF="TEXAS INSTRUMENTS", OC_FARNELL=2425791, SymbolName_1=BQ76940
JP1 JP2: library part RJ45-8PTH, "RJ45 JackSimple RJ45, 8-pin connection - connector for common Cat5, Cat5e, and Cat6 Ethernet cables. Footprint not yet proven in production. Connector sku is PRT-00643; Breakout PCB sku is BOB-00716.", MPN=RJHSE-5080, Blu=Blu, Brn=Brn, DeviceName=PTH, DeviceSetName=RJ45-8, GateName_1=JP1, Grn=Grn, LibraryName=SparkFun-Connectors, MF="AMPHENOL COMMERCIAL PRODUCTS", OC_FARNELL=1860577, Org=Org, PROD_ID=CONN-08506, SymbolName_1=RJ45-8, W/Grn=W/Grn
JP3: "JUMPER", DeviceSetName=JP1Q, GateName_1=A, LibraryName=jumper, SymbolName_1=J1
JP5: "PIN HEADER", DeviceSetName=PINHD-2X4, GateName_1=A, LibraryName=pinhead, SymbolName_1=PINH2X4
K1: "WR-WTB 2.00mm Male Vertical Shrouded Header, 2 Pins=>Code : Con_WTB_2.00_PCB_THT_62000211622  Details see: http://katalog.we-online.de/en/em/620_0xx_116_22Created 2014-06-05, Karrer Zheng2014 (C) Würth Elektronik", DeviceSetName=62000211622, GateName_1=G$1, LibraryName=Wire_to_Board_Connectors_rev15d, SymbolName_1=2
K4: "WR-MPC3 3.00mm Male Dual Row Vertical Header, 6 Pins=>Code : Con_WTB_MPC3_2_PCB_THT_66200621122  Details see: http://katalog.we-online.de/en/em/662_0xx_211_22Created 2014-06-06, Karrer Zheng2014 (C) Würth Elektronik", DeviceSetName=66200621122, GateName_1=G$1, LibraryName=Wire_to_Board_Connectors_rev15d, SymbolName_1=3X3-1
K5: "WR-MPC3 3.00mm Male Dual Row Vertical Header, 18 Pins=>Code : Con_WTB_MPC3_2_PCB_THT_66201821122  Details see: http://katalog.we-online.de/en/em/662_0xx_211_22Created 2014-06-06, Karrer Zheng2014 (C) Würth Elektronik", DeviceSetName=66201821122, GateName_1=G$1, LibraryName=Wire_to_Board_Connectors_rev15d, SymbolName_1=9X9
L1: library part WE-TPC_6823, "Shielded Tiny Power Inductor WE-TPC- Extremely flat power inductor- High current capability- High reliability and perfect soldering characteristics  because of integrated soldering pad- magnetically shielded-- Portable power like PDA, digital camera,    PCMICA-cards and displays-- DC/DC-converter-- Recommended for switching regulator IC's from    Linear Technology, National Semiconductor,    Texas Instruments and Fairchild Semiconductor  Details see: http://katalog.we-online.de/en/pbs/WE-TPC?Updated  by  Dan Xu 2014-07-112014 (C) Würth Elektronik", DeviceName=_6823, DeviceSetName=WE-TPC, GateName_1=G$1, LibraryName=PowerMagnetics, SymbolName_1=-L
L2: library part L-EUL2012C, "INDUCTOR, European symbol", DeviceName=L2012C, DeviceSetName=L-EU, GateName_1=G$1, LibraryName=rcl, SymbolName_1=L-EU
Q4: library part MOSFET-NCHANNELBSS138, "Common NMOSFET PartsMFG P/NStore IDProd IDFDD8780TRANS-09984SI7820DNTRANS-11055FDS6630AIC-080892N7002PWTRANS-11151FQP30N06L  COM-10213TRANS-10060BSS123LT1GTRANS-08345BSS138TRANS-00830BS1702N7000", MPN=2N7002,215, D=D, DeviceName=BSS138, DeviceSetName=MOSFET-NCHANNEL, G=G, GateName_1=G$1, LibraryName=SparkFun-DiscreteSemi, MF=NXP, OC_FARNELL=1510761, PROD_ID=TRANS-00830, S=S, SymbolName_1=MOSFET-NCHANNEL-1
Q5 Q6 Q7 Q8 Q9 Q10 Q11 Q12 Q13 Q14 Q15 Q16 Q17 Q18 Q19: "N-CHANNEL MOS FET with low VGS and ESD protection", MPN=DMN2004K-7, DeviceSetName=DMN2004K, GateName_1=G$1, LibraryName=resolut, MF="DIODES INC.", OC_FARNELL=1713842, SymbolName_1=N-MOS
R1 R2 R3 R5: library part R-EU_R0603, "RESISTOR, European symbol", MPN=RC0603FR-072K2L., DeviceName=R0603, DeviceSetName=R-EU_, GateName_1=G$1, LibraryName=rcl, MF="YAGEO (PHYCOMP)", OC_FARNELL=9238522, SymbolName_1=R-EU
R4: library part R-EU_R1206, "RESISTOR, European symbol", MPN=WCR0805-120RFI, DeviceName=R1206, DeviceSetName=R-EU_, GateName_1=G$1, LibraryName=rcl, MF=WELWYN, OC_FARNELL=1100308, SymbolName_1=R-EU
R6 R8 R9 R11 R12 R13 R15 R35 R36 R37 R38 R39 R40 R41 R42 R43 R44 R45 R46 R47 R48 R49 R50 R51 R52 R70 R71 R72 R73 R75 R77 R78 R79 R80: library part R-EU_R0603, "RESISTOR, European symbol", MPN=MCMR06X1001FTL, DeviceName=R0603, DeviceSetName=R-EU_, GateName_1=G$1, LibraryName=rcl, MF=MULTICOMP, OC_FARNELL=2073348, SymbolName_1=R-EU
R7 R17: library part R-EU_R0603, "RESISTOR, European symbol", MPN=RC0603FR-0710KL, DeviceName=R0603, DeviceSetName=R-EU_, GateName_1=G$1, LibraryName=rcl, MF="YAGEO (PHYCOMP)", OC_FARNELL=9238603, SymbolName_1=R-EU
R14: library part R-EU_R0603, "RESISTOR, European symbol", DeviceName=R0603, DeviceSetName=R-EU_, GateName_1=G$1, LibraryName=rcl, OC_FARNELL=unknown, SymbolName_1=R-EU
R20 R21 R22 R23 R24 R25 R26 R27 R28 R29 R30 R31 R32 R33 R34: library part R-EU_R2010, "RESISTOR, European symbol", MPN=ASC2010-33RFT4, DeviceName=R2010, DeviceSetName=R-EU_, GateName_1=G$1, LibraryName=rcl, MF=WELWYN, OC_FARNELL=2079038, SymbolName_1=R-EU
R53 R54 R55 R56 R57 R58 R59 R60 R61 R62 R63 R64 R65 R66 R67 R69 R74: library part R-EU_R0603, "RESISTOR, European symbol", MPN=ERJ3EKF1002V, DeviceName=R0603, DeviceSetName=R-EU_, GateName_1=G$1, LibraryName=rcl, MF="PANASONIC ELECTRONIC COMPONENTS", OC_FARNELL=2303192, SymbolName_1=R-EU
R68: library part R-EU_R0603, "RESISTOR, European symbol", MPN=CR0805-FX-1001ELF, DeviceName=R0603, DeviceSetName=R-EU_, GateName_1=G$1, LibraryName=rcl, MF=BOURNS, OC_FARNELL=2008380, SymbolName_1=R-EU
R76: library part R-EU_R0603, "RESISTOR, European symbol", MPN=ERJU06F1004V, DeviceName=R0603, DeviceSetName=R-EU_, GateName_1=G$1, LibraryName=rcl, MF="PANASONIC ELECTRONIC COMPONENTS", OC_FARNELL=2145441, SymbolName_1=R-EU
S1: "6x6 mm SMD WS-TASV Details see: http://katalog.we-online.de/em/datasheet/4301x2xxx8x6.pdf2015 (C) Würth Elektronik", DeviceSetName=430182050816, GateName_1=G$1, LibraryName=EAGLE-TACT_SWITCHES-rev16e, SymbolName_1=TAV
TEMP: "WR-MPC3 3.00mm Male Dual Row Angled Header with Plastic Pegs, 6 Pins=>Code : Con_WTB-MPC3_2_PCB_THT66200621022  Details see: http://katalog.we-online.de/en/em/662_0xx_210_22Created 2014-06-06, Karrer Zheng2014 (C) Würth Elektronik", DeviceSetName=66200621022, GateName_1=G$1, LibraryName=Wire_to_Board_Connectors_rev15d, SymbolName_1=3X3-1
U2: library part LMR16006SOT-23, "LMR16006 SIMPLE SWITCHER® 60 V 0.6 A Buck Regulators With High Efficiency ECO Mode", MPN=LMR16006XDDCT, DeviceName=SOT-23, DeviceSetName=LMR16006, GateName_1=U1, LibraryName=resolut, MF="TEXAS INSTRUMENTS", OC_FARNELL=2455133, SymbolName_1=LMR16006
U3: library part EEPROM-I2CSMD, "I2C EEPROM chips, 24LC256 (and others)", DeviceName=SMD, DeviceSetName=EEPROM-I2C, GateName_1=G$1, LibraryName=SparkFun-DigitalIC, SymbolName_1=EEPROM-I2C
U5: library part V_REG_MIC5235, MPN=MIC5225-3.3YM5-TR, DeviceSetName=V_REG_MIC5235, GateName_1=G$1, LibraryName=SparkFun-PowerIC, MF=MICROCHIP, OC_FARNELL=2510262, SymbolName_1=V-REG-LDO-ADJ
U6: "ARM Cortex-M4 32-bit MCU+FPU, 210 DMIPS, 1024 kB Flash, 192 kB Internal RAM, 51 I/Os, 64-pin LQFP, -40 to 85 degC, Tray", I/Os (High Current)=51, Manufacturer=STMicroelectronics, Operating Frequency(F) (Processor speed) (MHz)=168, Supplier Part Number 1=497-11767-ND, Supply Voltage(Vcc) max (V)=3.6, Supply Voltage(Vcc) min (V)=1.8, ComponentLink1Description="Manufacturer URL", ComponentLink1URL=http://www.st.com/web/en/home.html, ComponentLink2Description=Datasheet, ComponentLink2URL=http://www.st.com/st-web-ui/static/active/en/resource/technical/document/datasheet/DM00037051.pdf, ComponentLink3Description="Package Specification", ComponentLink3URL=http://www.st.com/st-web-ui/static/active/en/resource/technical/document/datasheet/DM00037051.pdf, Core="ARM Cortex-M4", D/A Converter=2x12-bit, DatasheetVersion="Rev. 4", FLASH Size (Prog) (kB)=1024, Internal RAM Size (kB)=192, Mounting Technology="Surface Mount", PackageDescription="64-Pin Low Profile Quad Flat Package, 10 x 10 mm Body, 0.5 mm Pitch", PackageReference=LQFP64, PackageVersion="Rev. 4, 06/2013", Packing=Tray, PartNumber=STM32F405RGT6, Supplier 1=Digi-Key, Supplier 2=Farnell, Supplier 3=Newark, Supplier 4=Mouser, Supplier Part Number 2=2064363, Supplier Part Number 3=73T2329, Supplier Part Number 4=511-STM32F405RGT6
U7: "High-Speed CAN Transceiver, 8-Pin SOIC, Industrial Temperature, Tape and Reel", Manufacturer=Microchip, Supplier Part Number 1=MCP2551T-I/SNTR-ND, Code_IPC=SOIC127P600-8, Code_JEDEC=MS-012, ComponentLink1Description="Manufacturer URL", ComponentLink1URL=http://www.microchip.com/, ComponentLink2Description=Datasheet, ComponentLink2URL=http://ww1.microchip.com/downloads/en/DeviceDoc/21667F.pdf, ComponentLink3Description="Package Specification", ComponentLink3URL=http://www.microchip.com/stellent/groups/techpub_sg/documents/packagingspec/en012702.pdf, DatasheetVersion="revF, Jul-2010", Mounting Technology="Surface Mount", PackageDescription="8-Lead Plastic Small Outline (SN) - Narrow, 3.90mm Body [SOIC]", PackageReference=SOIC-SN8, PackageVersion="revBB, Aug-2009", PartNumber=MCP2551T-I/SN, Supplier 1=Digi-Key, Supplier 2=Newark, Supplier 3=Mouser, Supplier Part Number 2=92C4188, Supplier Part Number 3=579-MCP2551T-I/SN
UEXT: "WR-BHD 2.54mm Male Box Header, 10 Pins=>Code : Con_WTB_BHD_2.54_Male_THT_WS_61201021621  Details see: http://katalog.we-online.de/en/em/612_0xx_216_21Created 2014-06-04, Karrer Zheng2014 (C) Würth Elektronik", DeviceSetName=UEXT, GateName_1=G$1, LibraryName=LibreSolar, SymbolName_1=UEXT
X1: library part CRYSTALMM20SS, "CRYSTAL", 1=1, 2=2, DeviceName=MM20SS, DeviceSetName=CRYSTAL, GateName_1=G$1, LibraryName=crystal, OC_FARNELL=unknown, OC_NEWARK=unknown, SymbolName_1=Q
Y1: library part RESONATOR1:1, "ResonatorSmall SMD resonator. This is the itty bitty 10/20MHz resonators with built in caps. CSTCE10M0G55 and CSTCE20M0V53. Footprint for SMD has been used in SFE production for years, and does work okay. 1:1 is an attempt to get larger fillets on the sides so it will be easier to inspect these solders in our AOI machine. The pads have been minimized to match the actual metal under the resonator. To see this relation, it includes an image import of the bottom side of the component. Imported to scale on layer 200.", MPN=CSTCE8M00G15C99-R0, DeviceName=1:1, DeviceSetName=RESONATOR, GateName_1=G$1, LibraryName=Testing, MF=MURATA, SymbolName_1=RESONATOR

## Via types
v1: diameter 1.27, hole 0.711, Top to Bottom, 56 vias

## Nets (pads, with @x,y where several pads share a name; then routed paths per layer and width w, separated by ;. In a path a pad name is that pad's centre, name@x,y a point inside that pad or via, vN(x,y) a via of type N, cw(c..) or ccw(c..) an arc to the next point about the centre after c; other vN are vias at no path point)
+3V3: C1.1 C20.1 C43.1 C44.1 C45.1 C49.1 C50.1 C51.1 CORTEX.1 R1.2 R2.2 R3.2 R5.2 U3.1 U3.8 U5.5 U6.1 U6.13 U6.19 U6.32 U6.48 U6.64 U7.5 UEXT.1 | length 172.8
  Top w0.152: U7.5@-38.989,43.985 -38.561,43.985 -37.846,43.27 -36.957,43.27 ; C51.1@-36.97,42.394 -36.957,42.407 -36.957,43.27 ; v1(9.652,60.706) 9.652,59.221 C50.1@11.176,57.697 11.234,57.639 C49.1@14.764,57.639 ; v1(11.049,43.688) 10.795,43.434 -10.795,43.434 -10.959,43.27 -36.957,43.27 ; C43.1@12.446,48.807 12.446,48.931 U6.13@14.897,48.931 ; U6.1@14.897,54.931 15.113,55.147 15.113,56.134 ; C49.1@15.113,57.57 15.113,56.134 ; U6.64@16.697,56.731 15.71,56.731 15.113,56.134 ; C44.1@17.233,42.291 17.272,42.33 v1(17.272,43.748) 17.697,44.173 U6.19@17.697,45.631 ; R1.2@19.328,61.859 20.447,61.859 ; v1(19.558,63.246) 20.447,62.357 20.447,61.859 ; R2.2@21.599,61.859 20.447,61.859 ; v1(24.197,43.748) U6.32@24.197,45.631 ; v1(25.019,65.151) CORTEX.1@26.543,65.151 ; U6.48@25.997,54.931 28.293,54.931 C45.1@29.083,54.141 v1(30.441,54.141) ; C1.1@27.344,25.781 28.844,27.281 U5.5@28.844,28.053 ; R5.2@28.956,45.505 29.298,45.505 30.269,44.534 ; v1(29.21,43.561) 29.296,43.561 30.269,44.534 ; R3.2@29.464,50.126 29.552,50.038 v1(34.163,50.038) 34.544,49.657 34.544,45.085 ; C20.1@39.624,44.323 39.413,44.534 U3.1@37.18,44.534 35.095,44.534 34.544,45.085 ; 30.269,44.534 U3.8@31.948,44.534 33.993,44.534 34.544,45.085
  Bottom w0.152: UEXT.1@3.175,70.358 10.287,63.246 ; v1(9.652,60.706) 10.287,61.341 10.287,63.246 ; v1(11.049,43.688) v1(17.272,43.748) v1(24.197,43.748) 29.023,43.748 v1(29.21,43.561) ; v1(34.163,50.038) 30.441,53.76 v1(30.441,54.141) 30.441,58.332 25.019,63.754 v1(25.019,65.151) 23.114,63.246 v1(19.558,63.246) 10.287,63.246
+5V: C2.1 C42.1 C46.1 L1.2 R68.2 U5.1 U5.3 U7.3 | length 125.3
  Top w0.152: U7.3@-40.259,39.185 -40.044,38.97 C46.1@-40.044,36.505 -38.21,34.671 v1(13.462,34.671) ; v1@25.146,34.417 v1(25.4,34.417) 29.028,34.417 29.718,33.727 ; U5.3@26.944,30.653 26.944,29.738 27.178,29.504 28.615,29.504 28.844,29.733 U5.1@28.844,30.653 28.844,32.653 C2.1@28.744,32.753 29.718,33.727 ; R68.2@38.989,36.664 39.331,36.664 40.894,38.227 42.799,38.227 45.339,35.687 45.339,25.527 41.719,21.907 L1.2@37.084,21.907 35.19,21.907 C42.1@31.494,25.603 29.718,27.379 29.718,33.727
  Bottom w0.152: v1(13.462,34.671) 25.146,34.671 v1(25.4,34.417)
CAP1: C14.1 IC1.7 | length 4
  Top w0.152: IC1.7@-50.172,-16.471 -50.172,-13.155 C14.1@-49.672,-12.655
CAP2: C16.1 IC1.11 IC1.12 IC1.14 | length 6.8
  Top w0.152: C16.1@-53.872,-12.655 -53.872,-14.2 -53.672,-14.4 -53.672,-14.986 ; IC1.14@-53.672,-16.471 -53.672,-14.986 ; IC1.11@-52.172,-16.471 IC1.12@-52.672,-16.471 -52.672,-15.146 -52.832,-14.986 -53.672,-14.986
CAP3: C18.1 IC1.16 IC1.17 IC1.19 | length 7.2
  Top w0.152: C18.1@-57.492,-12.7 -57.492,-13.628 -56.172,-14.948 ; IC1.19@-56.172,-16.471 -56.172,-14.948 ; IC1.16@-54.672,-16.471 IC1.17@-55.172,-16.471 -55.172,-15.186 -55.41,-14.948 -56.172,-14.948
GND: C1.2 C2.2 C3.2 C5.2 C6.2 C7.2 C10.2 C11.2 C12.2 C13.2 C14.2 C19.2 C20.2 C21.2 C22.2 C37.2 C41.2 C42.2 C43.2 C44.2 C45.2 C46.2 C47.2 C48.2 C49.2 C50.2 C51.2 CELLS.1 CORTEX.3 CORTEX.5 D1.3 D5.A D22.A D24.C D26.C D27.A D28.A D30.A IC1.3 K4.1 K5.1 LED1.K LED2.K R17.2 R69.1 R72.1 R74.1 R76.1 R78.1 R80.1 TEMP.1 U2.2 U3.2 U3.3 U3.4 U3.7 U5.2 U6.12 U6.18 U6.63 U7.2 U7.8 UEXT.2 Y1.2 | length 141.3
  Top w0.152: C11.2@-53.428,-9.906 -53.34,-9.818 v1(-53.34,-8.382) ; IC1.3@-48.172,-16.471 v1(-48.172,-18.376) -47.078,-18.376 -45.085,-16.383 -42.46,-16.383 R76.1@-39.572,-19.271 ; C10.2@-48.172,-10.255 -48.172,-11.557 ; C14.2@-47.972,-12.655 -48.172,-12.455 -48.172,-11.557 ; v1(-46.228,-11.303) -46.482,-11.557 -48.172,-11.557 ; v1(-43.942,44.323) -43.604,43.985 U7.8@-42.799,43.985 ; C46.2@-41.744,36.505 -41.529,36.72 U7.2@-41.529,39.185 -40.788,39.926 -40.788,40.204 -39.716,41.275 -36.389,41.275 C51.2@-35.27,42.394 ; C5.2@-37.972,-24.071 -36.83,-22.929 v1(-36.83,-22.86) ; C6.2@-37.972,-21.671 -37.972,-21.718 v1(-36.83,-22.86) ; D27.A@-35.972,-24.071 -35.972,-23.718 v1(-36.83,-22.86) ; D28.A@-35.972,-21.671 -35.972,-22.002 v1(-36.83,-22.86) ; D1.3@-34.02,45.194 -32.022,45.194 v1(-32.004,45.212) ; C21.2@7.747,48.553 9.056,48.553 11.01,50.507 C43.2@12.446,50.507 13.522,49.431 U6.12@14.897,49.431 ; C50.2@11.176,59.397 v1(13.081,59.397) 14.706,59.397 C49.2@14.764,59.339 ; C49.2@15.113,59.27 15.621,59.27 ; R78.1@16.549,37.592 C19.2@16.549,39.99 15.533,41.006 15.533,43.473 16.562,44.502 17.197,44.502 U6.18@17.197,45.631 ; R17.2@17.057,61.898 15.621,60.462 15.621,59.27 ; U6.63@17.197,56.731 17.197,58.495 16.422,59.27 15.621,59.27 ; D5.A@24.251,-41.571 v1(25.996,-43.316) C22.2@25.996,-44.958 28.028,-44.958 C37.2@28.194,-44.792 ; CORTEX.5@26.543,62.611 CORTEX.3@26.543,63.881 27.432,63.881 27.813,64.262 28.575,64.262 29.947,65.634 32.099,65.634 32.2,65.532 32.512,65.532 33.655,64.389 33.655,59.182 30.314,55.841 C45.2@29.083,55.841 ; U5.2@27.894,30.653 27.894,31.542 27.044,32.392 C2.2@27.044,32.753 25.4,31.109 25.4,26.797 26.565,25.632 26.565,25.186 27.114,24.638 27.901,24.638 C1.2@29.044,25.781 ; C42.2@31.494,27.503 33.909,29.918 D22.A@33.909,29.972 33.694,30.187 C41.2@33.694,33.153 32.364,34.483 C3.2@31.115,34.483 C3.2@31.494,34.104 ; U3.2@37.18,45.804 U3.2@37.988,45.804 ; U3.4@37.988,48.344 U3.2@37.988,45.804 ; C20.2@39.624,46.023 39.405,45.804 U3.2@37.988,45.804 ; U2.2@41.432,31.75 42.291,31.75 42.926,32.385 42.926,35.267 R69.1@41.529,36.664 ; LED1.K@45.974,51.562 D24.C@46.621,55.626 ; LED2.K@52.451,51.562 D26.C@53.098,54.864 ; D30.A@61.08,22.606 61.253,22.779 R72.1@61.253,24.915
  other v1: 32.766,28.775 25.4,30.353 -39.116,41.275
MCU_IN: D29.A K1.1 R73.2 S1.2 S1.4 | length 20.2
  Top w0.152: K1.1@63.751,39.45 65.526,37.675 ; D29.A@65.526,44.85 65.526,37.675 ; S1.2@67.201,27.875 S1.4@67.201,35.825 67.201,36 65.526,37.675
NetC3_1: C3.1 CELLS.18 D6.A K5.18 L2.2 R6.1 R11.1 R77.2 | length 192.3
  Top w0.152: R11.1@-62.572,-10.414 -62.572,-5.676 ; K5.18@-48.308,-34.736 -50.913,-32.131 -60.96,-32.131 -76.327,-16.764 -76.327,-9.271 -72.732,-5.676 -62.572,-5.676 ; L2.2@34.094,36.353 31.145,36.353 C3.1@31.115,36.383 25.461,36.383 21.971,32.893 21.668,32.893 20.805,32.029 20.089,32.029 19.226,32.893 18.835,32.893 R77.2@16.549,35.179 15.784,34.414 15.578,34.62 14.633,34.62 13.82,33.807 13.104,33.807 12.545,34.366 -22.603,34.366 -23.187,33.782 -23.368,33.782 -38.887,18.263 -40.363,18.263 -43.18,15.445 -43.18,-1.182 R6.1@-44.958,-2.96 -46.445,-1.473 D6.A@-48.006,-1.473 -49.225,-0.254 -57.15,-0.254 -62.572,-5.676
NetC4_1: C4.1 C5.1 D27.C IC1.42 R8.2 | length 26.7
  Top w0.152: IC1.42@-48.172,-22.071 -48.046,-22.198 -48.046,-23.466 -47.89,-23.622 -43.434,-23.622 -42.772,-22.96 C4.1@-42.772,-22.271 -41.737,-22.271 -39.937,-24.071 C5.1@-39.672,-24.071 -38.597,-25.146 -34.747,-25.146 D27.C@-33.672,-24.071 -31.672,-24.071 -31.672,-18.874 R8.2@-32.385,-18.161
NetC4_2: C4.2 C6.1 D28.C IC1.43 R9.2 | length 20.5
  Top w0.152: IC1.43@-47.672,-22.071 -47.546,-22.198 -47.546,-22.966 -47.412,-23.1 -45.301,-23.1 C4.2@-44.472,-22.271 -44.472,-21.612 -43.942,-21.082 -40.261,-21.082 C6.1@-39.672,-21.671 -38.608,-20.607 -34.736,-20.607 ; R9.2@-35.013,-17.949 -35.013,-18.581 -34.736,-18.858 -34.736,-20.607 ; D28.C@-33.672,-21.671 -33.655,-21.654 -33.655,-20.894 -33.942,-20.607 -34.736,-20.607
NetC7_1: C7.1 R79.1 R80.2 U6.21 | length 10.5
  Top w0.152: U6.21@18.697,45.631 18.697,41.374 C7.1@19.9,40.171 ; R79.1@19.851,35.423 C7.1@19.851,40.005
NetC8_1: C8.1 D4.C IC1.20 R11.2 | length 45.7
  Top w0.152: R11.2@-60.872,-10.414 -59.913,-9.455 C8.1@-58.622,-9.455 -58.622,-14.276 -58.429,-14.469 -57.406,-14.469 -56.798,-15.076 -56.798,-16.345 IC1.20@-56.672,-16.471 ; v1(-43.942,-35.56) -43.637,-35.56 D4.C@-42.291,-36.906
  Bottom w0.152: v1(-58.928,-12.065) -59.792,-12.929 -59.792,-13.692 -60.782,-14.683 -60.782,-19.686 -59.408,-21.06 -59.091,-21.377 -58.75,-21.718 -58.75,-22.686 -45.876,-35.56 v1(-43.942,-35.56)
NetC8_2: C8.2 C9.1 C17.2 C18.2 C32.2 C39.1 D3.C IC1.15 K4.3 R12.2 TEMP.3 | length 119.4
  Top w0.152: TEMP.3@-70.104,-10.256 -69.184,-10.256 -67.818,-8.89 -66.389,-8.89 -65.532,-9.747 -65.532,-10.911 C17.2@-59.772,-16.671 -59.772,-14.396 v1(-60.96,-13.208) ; v1(-61.214,-8.636) -59.233,-6.655 R12.2@-58.972,-6.655 -57.422,-6.655 C9.1@-56.822,-6.055 -56.822,-7.44 -55.822,-8.44 C8.2@-55.822,-9.455 -55.792,-9.485 C18.2@-55.792,-12.7 -55.792,-13.55 -54.172,-15.17 IC1.15@-54.172,-16.471 ; C32.2@-19.949,-44.971 C39.1@-18.249,-44.971 -18.249,-44.235 v1(-19.05,-43.434) ; D3.C@-15.24,-52.527 -14.859,-52.146 v1(-14.859,-51.054)
  Bottom w0.152: v1(-60.96,-13.208) -61.214,-12.954 v1(-61.214,-8.636) -59.309,-10.541 -58.293,-10.541 -57.531,-11.303 -57.531,-12.954 -59.69,-15.113 -59.69,-19.431 -57.912,-21.209 -56.134,-21.209 -33.909,-43.434 v1(-19.05,-43.434) -14.859,-47.625 v1(-14.859,-51.054)
NetC9_2: C9.2 C12.1 C15.2 C16.2 C27.2 C38.1 D2.C IC1.10 K4.2 R13.2 R14.1 TEMP.2 | length 131.8
  Top w0.152: TEMP.2@-70.104,-13.256 -68.786,-11.938 -66.294,-11.938 -63.5,-14.732 -63.5,-16.764 -61.976,-18.288 -60.755,-18.288 C15.2@-59.772,-19.271 -58.641,-19.271 v1(-58.166,-18.796) ; R13.2@-56.172,-3.255 -56.125,-3.302 -55.372,-3.302 ; C12.1@-53.216,-2.032 -54.486,-3.302 -55.372,-3.302 ; IC1.10@-51.672,-16.471 -51.672,-15.13 -52.172,-14.63 C16.2@-52.172,-12.655 v1(-53.594,-11.233) -54.61,-10.217 -54.61,-6.643 C9.2@-54.022,-6.055 ; R14.1@-51.622,-7.305 -52.772,-7.305 C9.2@-54.022,-6.055 ; v1(2.667,-43.815) 3.251,-44.399 C27.2@3.251,-44.971 C38.1@4.951,-44.971 ; v1(6.731,-50.038) 7.089,-50.396 D2.C@8.201,-50.396 ; -55.372,-3.302 -54.022,-4.652 C9.2@-54.022,-6.055
  Bottom w0.152: v1(-53.594,-11.233) -53.594,-14.224 v1(-58.166,-18.796) -57.023,-18.796 -33.528,-42.291 -18.669,-42.291 -17.145,-43.815 v1(2.667,-43.815) 2.667,-45.974 v1(6.731,-50.038)
NetC10_1: C10.1 IC1.8 R74.2 U2.4 | length 132.1
  Top w0.152: IC1.8@-50.672,-16.471 -50.672,-11.055 C10.1@-49.872,-10.255 -49.872,-10.248 -49.022,-9.398 v1(-45.339,-9.398) ; v1(28.829,38.227) 37.118,38.227 R74.2@37.844,38.953 37.846,38.951 37.846,33.686 U2.4@38.832,32.7
  Bottom w0.152: v1(-45.339,-9.398) -43.307,-9.398 -33.782,0.127 -33.782,18.415 -30.041,22.156 -29.951,22.066 -29.446,22.066 -26.874,24.638 -26.797,24.638 -15.875,35.56 26.162,35.56 v1(28.829,38.227)
NetC11_1: C11.1 IC1.9 Q4.2 | length 10.4
  Top w0.152: IC1.9@-51.172,-16.471 -51.172,-12.074 -51.728,-11.518 C11.1@-51.728,-9.906 -51.728,-9.056 -50.988,-8.316 Q4.2@-49.26,-8.316
NetC13_1: C13.1 IC1.6 K4.4 R15.1 TEMP.4 U6.36 | length 245
  Top w0.152: TEMP.4@-67.104,-16.256 -61.489,-21.871 C13.1@-61.472,-21.871 -61.472,-21.34 -60.96,-20.828 -58.42,-20.828 -56.388,-18.796 -50.8,-18.796 -49.672,-17.668 IC1.6@-49.672,-16.471 -49.672,-14.603 -48.967,-13.898 -46.764,-13.898 -42.672,-9.806 -42.672,11.022 -41.402,12.292 -41.402,13.589 -40.488,14.503 -40.488,15.62 -22.935,33.172 -22.351,33.757 12.293,33.757 12.852,33.198 14.072,33.198 14.885,34.011 15.325,34.011 16.037,33.299 17.07,33.299 31.243,19.126 41.274,19.126 41.364,19.215 46.406,24.258 46.406,35.813 41.3,40.919 28.931,40.919 24.765,45.085 24.765,46.482 24.13,47.117 24.13,48.387 24.674,48.931 U6.36@25.997,48.931 27.468,48.931 28.067,49.53 28.067,50.419 28.575,50.927 41.148,50.927 45.085,46.99 R15.1@61.888,46.99
NetC15_1: C15.1 IC1.13 K4.5 TEMP.5 | length 20
  Top w0.152: TEMP.5@-67.104,-13.256 -67.104,-14.176 -62.009,-19.271 C15.1@-61.472,-19.271 -61.472,-19.808 -60.96,-20.32 -58.42,-20.32 -56.388,-18.288 -53.848,-18.288 -53.172,-17.612 IC1.13@-53.172,-16.471
NetC17_1: C17.1 IC1.18 K4.6 TEMP.6 | length 16.2
  Top w0.152: TEMP.6@-67.104,-10.256 -61.472,-15.888 C17.1@-61.472,-16.671 -60.363,-17.78 -55.88,-17.78 -55.672,-17.572 IC1.18@-55.672,-16.471
NetC19_1: C19.1 R77.1 R78.2 U6.20 | length 11.1
  Top w0.152: U6.20@18.122,45.556 U6.20@18.197,45.631 18.197,40.042 C19.1@18.249,39.99 R78.2@18.249,37.592 R77.1@18.249,35.179 R77.1@18.249,34.671
NetC21_1: C21.1 CORTEX.10 U6.7 | length 27.8
  Top w0.152: C21.1@7.747,50.253 9.994,50.253 11.672,51.931 U6.7@14.897,51.931 v1(16.498,51.931) ; v1(28.575,57.912) 29.21,57.912 CORTEX.10@31.369,60.071
  Bottom w0.152: v1(16.498,51.931) 21.07,51.931 21.451,52.312 23.102,52.312 28.575,57.785 v1(28.575,57.912)
NetC22_1: C22.1 C23.2 IC1.40 K1.2 R36.2 R54.1 S1.1 S1.3 | length 187.5
  Top w0.152: IC1.40@-49.172,-22.071 -49.172,-24.03 -48.984,-24.219 -48.894,-24.308 -43.904,-24.308 -30.417,-37.795 -15.212,-37.795 -11.859,-41.148 20.486,-41.148 v1(22.606,-43.268) C22.1@24.296,-44.958 24.13,-45.124 R36.2@24.13,-47.029 24.038,-47.121 R54.1@22.201,-47.121 22.201,-45.227 C23.2@21.932,-44.958 ; v1(58.039,25.527) 60.387,27.875 S1.1@62.701,27.875 S1.3@62.701,35.825
  Bottom w0.152: v1(22.606,-43.268) 58.039,-7.835 v1(58.039,25.527)